# EAGLE board 800i Puissance-regulateur 2020serie1 (EAGLE 7.1.0)
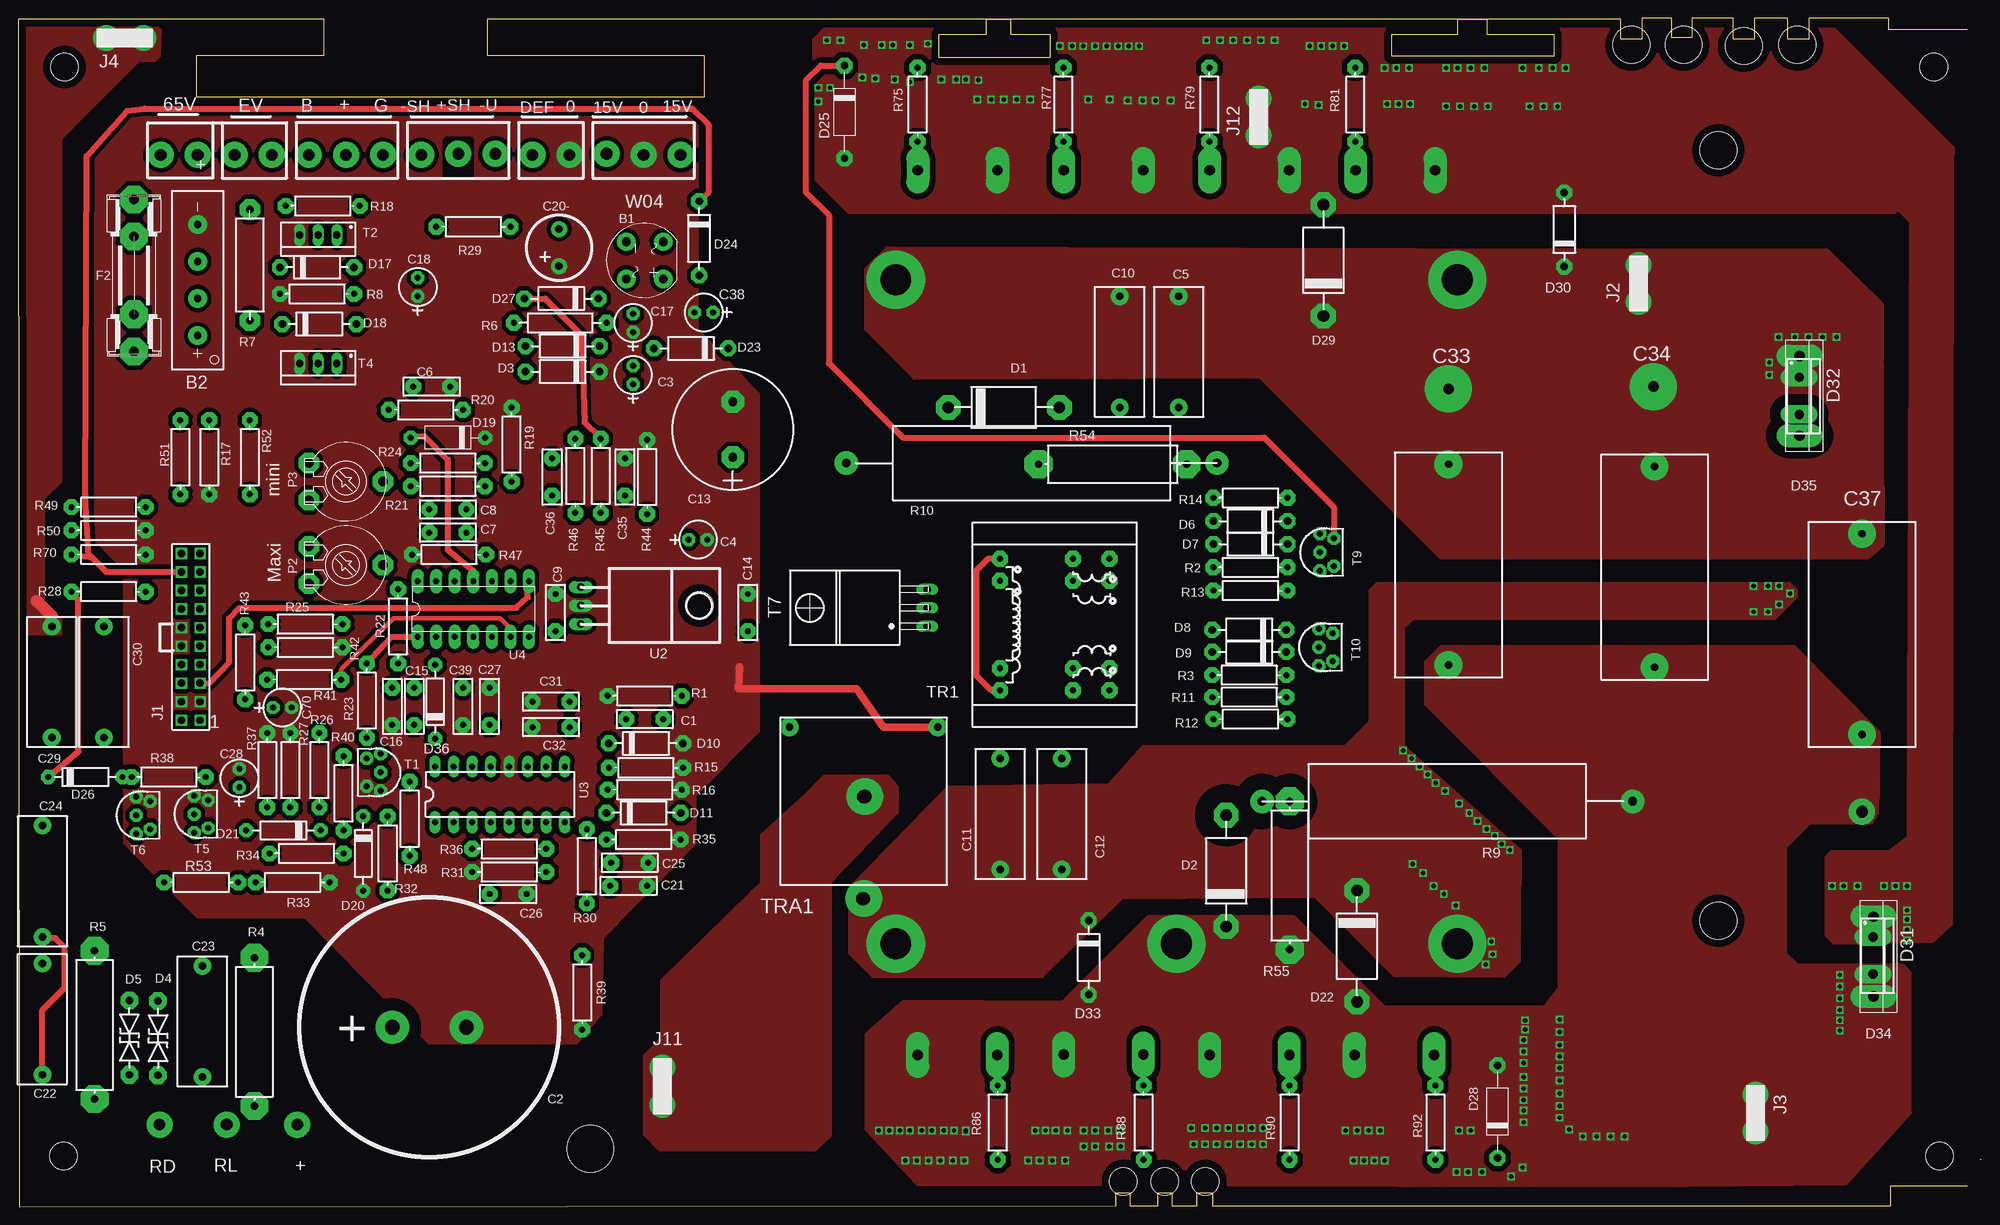
[diagram p0: board, top side]
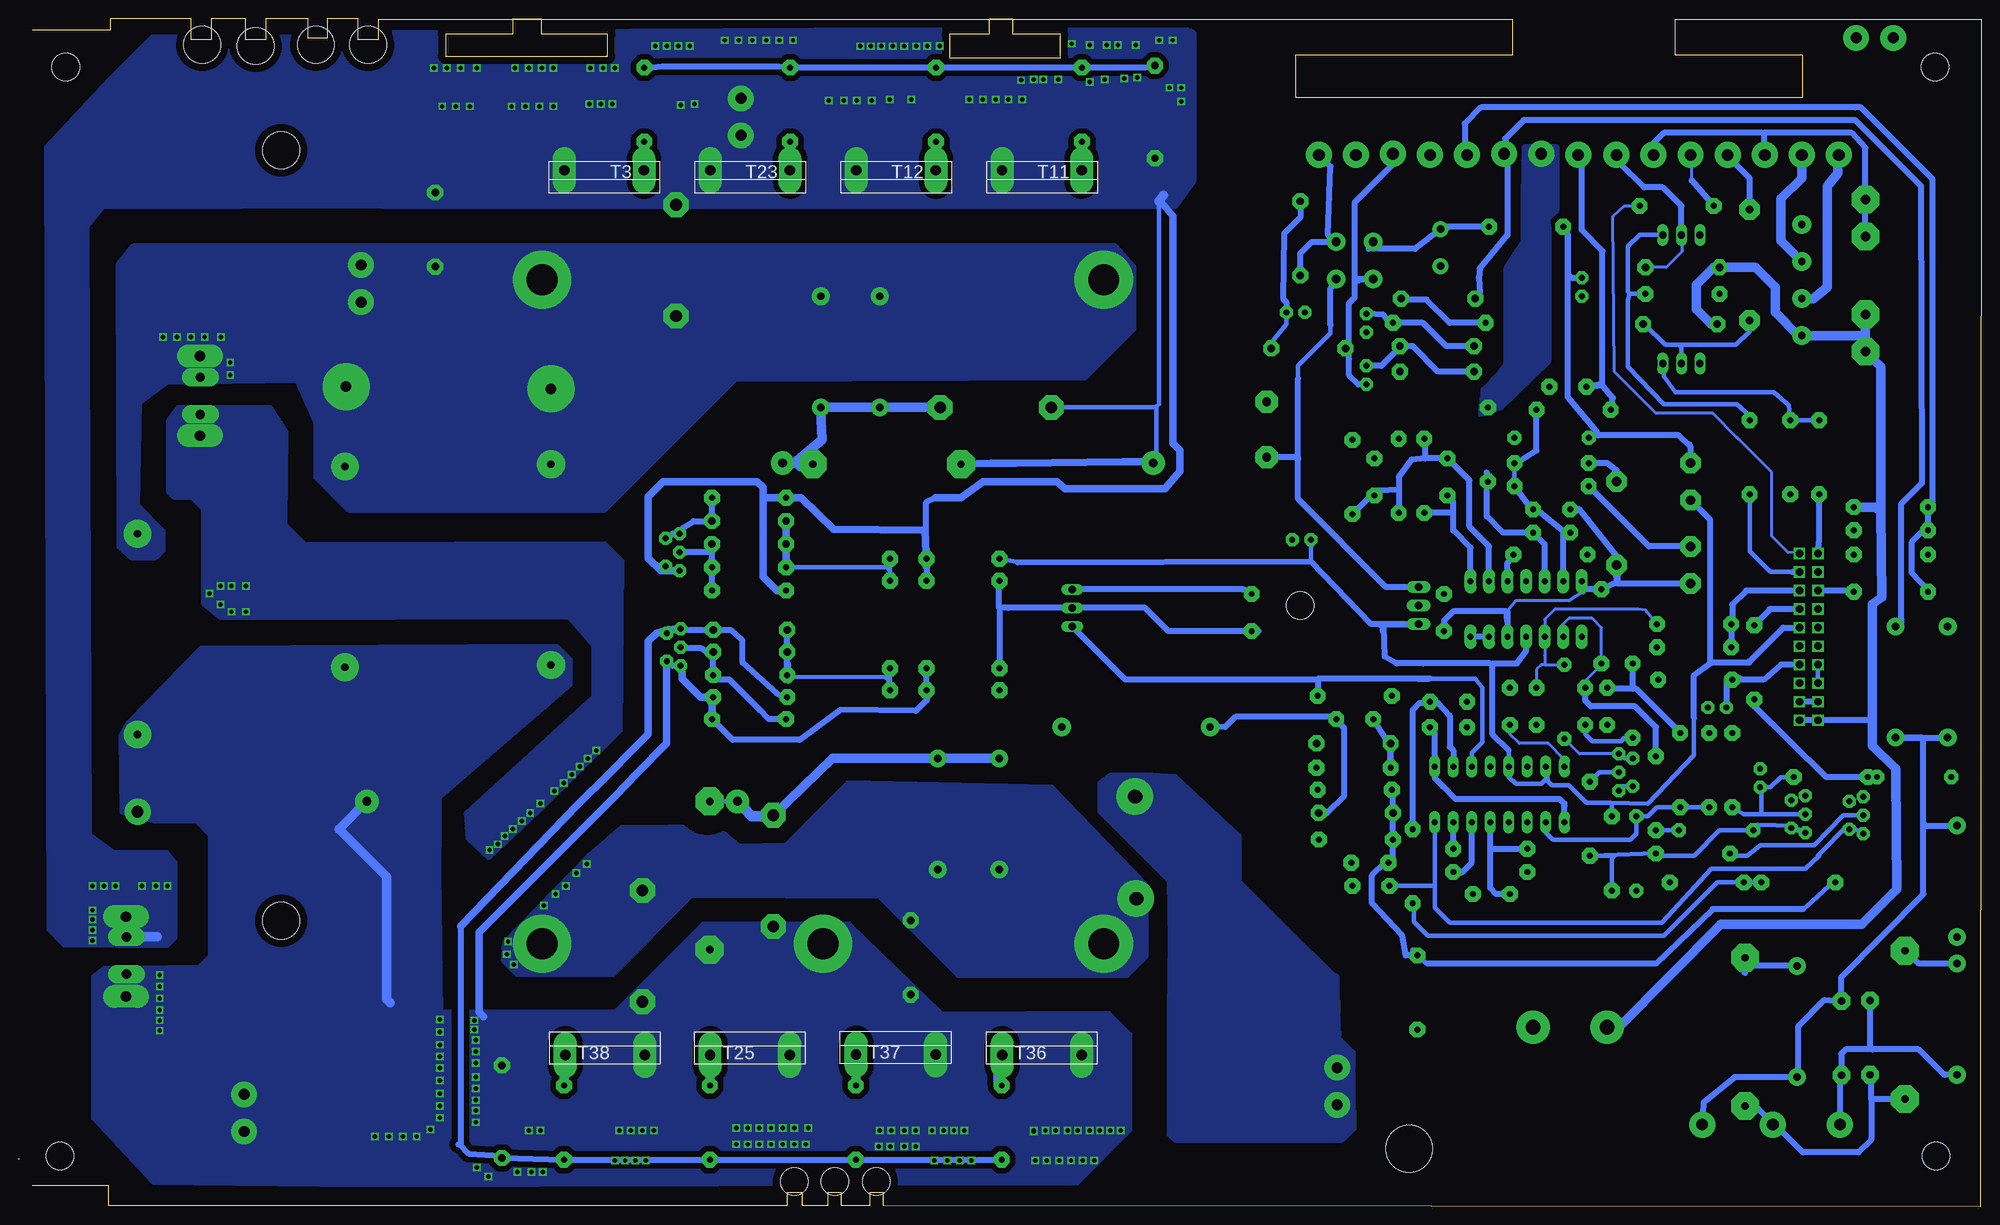
[diagram p1: board, bottom side, seen from below]

Size 269.08 x 162.87 mm. Coordinates in mm from the lower left corner, seen from the top.
Outline: 267.16,2.86 256.69,2.86 256.69,0.15 163.67,0.15 163.67,1.9 161.6,1.9 161.6,0.15 158.11,0.15 158.11,1.9 156.21,1.9 156.21,0.15 152.4,0.15 152.4,1.9 150.49,1.9 150.49,0.15 0.16,0 0,162.71 41.91,162.71 41.91,157.79 24.44,157.79 24.44,152.08 93.98,152.08 93.98,157.79 64.29,157.79 64.29,162.71 197.32,162.71
Outline: 267.17,161.28 266.7,161.28 256.38,161.28 256.38,162.87 245.42,162.87 245.42,160.01 242.57,160.01 242.57,162.87 237.96,162.87 237.96,160.01 235.1,160.01 235.1,162.87 229.39,162.87 229.39,160.17 226.69,160.17 226.69,162.87 222.56,162.87 222.56,160.01 219.71,160.01 219.71,162.71 197.32,162.71
Outline: 268.92,6.5 269.08,6.5
Outline: 197.32,162.71 197.32,160.65 188.27,160.65 188.27,157.63 210.5,157.63 210.5,160.65 201.29,160.65 201.29,162.71 197.32,162.71
Outline: 126.2,160.65 132.71,160.65 132.71,162.71 136.04,162.71 136.04,160.65 141.44,160.65 141.44,157.47 126.2,157.47 126.2,160.65
Copper layers (1*16): Top 0.035mm / dielectric 1.5mm / Bottom 0.035mm
Design rules "default": minimum track width 10mil, minimum drill 24mil, track to track 8mil, track to pad 8mil, pad to pad 8mil, via to via 8mil, smd to smd 8mil, copper to edge 40mil, drill to drill 8mil, minimum pad ring 10mil, minimum via ring 8mil, stop-mask expansion 0mil, vias tented up to drill 0mil, thermal gap 10mil
Holes 3.81 mm at 93.34,82.38 6.35,156.2 6.19,6.98 151.44,3.49 157.16,3.49 162.71,3.49 262.57,156.2 263.36,6.98
Holes 6.45 mm at 78.42,7.93
Holes 5.08 mm at 221.13,159.22 228.28,159.22 236.53,159.06 243.84,159.22 233.04,144.77 233.04,39.21
tRestrict: area 162.7,50.8 to 168.4,56.5; area 168.1,53.2 to 172.9,58; area 49.2,22.5 to 53.4,26.7; area 48.1,21.4 to 54.4,27.8; area 171.9,53.2 to 176.7,58; area 58.7,141.4 to 61.9,146
bRestrict: area 167,52 to 174,59.1; area 171.1,51.7 to 178.1,58.8

## Footprints (pad centres in the part's own frame; a part is rotated, then mirrored left to right if it is on the bottom)
WM = drill 1.2 pad 2.5: 1 -2.54,-2.54; 2 -2.54,2.54; 3 2.54,-2.54; 4 2.54,2.54
BR-24*7 = drill 0.406 pad 1.93 octagon: + 0,0; - 15.24,0; AC1 5.08,0; AC2 10.16,0
C-5 = drill 0.813 pad 2.159 octagon: 1 5.08,0; 2 0,0
470U_400 = drill 2 pad 4.572: N 10.16,0; P 0,0
02P000RA = drill 0.813 pad 1.778 octagon: N 2.54,0; P 0,0
C-15 = drill 1.016 pad 2.413: 1 0,0; 2 15.24,0
02P025RA = drill 1.2 pad 3.048 octagon: N 7.62,0; P 0,0
02P010RA = drill 1.016 pad 2.184: N 5.08,0; P 0,0
C-5@2 = drill 0.813 pad 2.159 octagon: 1 5.08,0; 2 0,0
C-30 = drill 1.016 pad 3.81: 1 0,0; 2 27.5,0
D-15 = drill 1.6 pad 3.4 octagon: A -7.62,0; K 7.62,0
D-10_1MM = drill 1.016 pad 2.184 octagon: A -5.08,0; K 5.08,0
TRANS-10 = drill 1.016 pad 2.413 octagon: A -5.08,0; K 5.08,0
D-10 = drill 0.813 pad 1.93 octagon: A -5.08,0; K 5.08,0
D-10@2 = drill 0.813 pad 1.93 octagon: A -5.08,0; K 5.08,0
D-12,5 = drill 1.016 pad 2.184 octagon: 1 -6.35,0; 2 6.35,0
TO220DIO = drill 1.27 pad 2.54 long: A 5.08,0; K 0,0
DOP-3V = drill 1.422 pad 3.175 long: A 5.461,0; K -5.461,0
SHK20L = drill 1.321 pad 3.81 octagon: 1A -10.414,0; 1B -5.334,0; 2A 10.414,0; 2B 5.334,0
CON10X2 = drill 0.813 pad 1.524 octagon: 1 0,0; 2 0,2.54; 3 2.54,0; 4 2.54,2.54; 5 5.08,0; 6 5.08,2.54; 7 7.62,0; 8 7.62,2.54; 9 10.16,0; 10 10.16,2.54; 11 12.7,0; 12 12.7,2.54; 13 15.24,0; 14 15.24,2.54; 15 17.78,0; 16 17.78,2.54; 17 20.32,0; 18 20.32,2.54; 19 22.86,0; 20 22.86,2.54
2_TROUS = drill 1.5 pad 3.5: 1 0,0; 2 0,5.08
PT-10 = drill 1.27 pad 2.794 octagon: 1 -2.54,-5.08; 2 2.54,-5.08; 3 0,5.08
PAST_4,2 = drill 4.2 pad 8: 1 0,0
R-10 = drill 0.813 pad 2.159 octagon: 1 -5.08,0; 2 5.08,0
R-18 = drill 1.016 pad 3.81 octagon: 1 -8.89,0; 2 11.43,0
R-12,5 = drill 0.813 pad 2.184 octagon: 1 -6.35,0; 2 6.35,0
R-15 = drill 1.016 pad 2.794 octagon: 1 -7.62,0; 2 7.62,0
R-50-5W = drill 1.2 pad 3.2: 1 2.54,0; 2 53.34,0
TO92_L = drill 0.813 pad 1.778 octagon: 1 0,0; 2 1.905,1.905; 3 3.81,0; 4 -0.635,1.905; 5 4.445,1.905
TO220V = drill 1.016 pad 1.524 long: 1 0,0; 2 2.54,0; 3 5.08,0
TOP-3VI = drill 1.422 pad 3.175 long: 1 5.461,0; 3 -5.461,0
TO220H = drill 1.016 pad 1.524 long: 1 0,0; 2 2.54,0; 3 5.08,0
TIUTK120 = drill 0.813 pad 2.184 octagon: 1 7.5,7.5; 3 7.5,-7.5; 4 7.5,-2.5; 5 -7.5,-7.5; 6 -7.5,-2.5; 8 -7.5,7.5
TISIRIO1 = drill 1.016 pad 2.54: P1 0,0; P2 20.32,0 | drill 1.8 pad 5: S1 10,9.5; S2 10.16,23.495
TO220H' = drill 1.016 pad 1.651 long: 1 0,0; 2 2.54,0; 3 5.08,0
DIL16 = drill 0.813 pad 1.524 long: 1 -8.89,-3.81; 2 -6.35,-3.81; 3 -3.81,-3.81; 4 -1.27,-3.81; 5 1.27,-3.81; 6 3.81,-3.81; 7 6.35,-3.81; 8 8.89,-3.81; 9 8.89,3.81; 10 6.35,3.81; 11 3.81,3.81; 12 1.27,3.81; 13 -1.27,3.81; 14 -3.81,3.81; 15 -6.35,3.81; 16 -8.89,3.81
DIL-14 = drill 0.813 pad 1.676 long: 1 -7.62,-3.81; 2 -5.08,-3.81; 3 -2.54,-3.81; 4 0,-3.81; 5 2.54,-3.81; 6 5.08,-3.81; 7 7.62,-3.81; 8 7.62,3.81; 9 5.08,3.81; 10 2.54,3.81; 11 0,3.81; 12 -2.54,3.81; 13 -5.08,3.81; 14 -7.62,3.81
PAST_1,8 = drill 1.8 pad 4.572: P$1 0,0
PAST_1,6 = drill 1.6 pad 3.556: 1 0,0
PAST_1,0 = drill 1.016 pad 2.54: 1 0,0

## Placement (x,y rotation side)
B1  W04  [WM]  85.88,129.69 90 top
B2  6A 400V  [BR-24*7]  24.6,119.37 90 top
C1  0.1µF  [C-5]  83.34,66.83 0 top
C2  4700µF 100v  [470U_400]  51.27,24.6 0 top
C3  100µF  [02P000RA]  84.29,112.71 90 top
C4  22µF  [02P000RA]  91.91,91.43 0 top
C5  4.7nF 1000V  [C-15]  159.06,124.77 270 top
C6  100n  [C-5]  54.13,112.39 0 top
C7  10n  [C-5]  56.35,92.39 0 top
C8  1n  [C-5]  61.43,95.56 180 top
C9  10nF  [C-5]  73.66,83.97 270 top
C10  4.7nF 1000V  [C-15]  150.97,124.77 270 top
C11  4.7nF 1000V  [C-15]  134.62,46.19 90 top
C12  4.7nF 1000V  [C-15]  143.03,46.19 90 top
C13  2200µF25V  [02P025RA]  97.94,102.7 90 top
C14  1nf  [C-5]  100.01,83.97 270 top
C15  4.7n  [C-5]  54.29,71.11 270 top
C16  néant  [C-5]  51.27,71.11 270 top
C17  22µF63v  [02P000RA]  84.29,119.85 90 top
C18  22µF25V  [02P000RA]  54.76,124.77 90 top
C20-  470µF25V  [02P010RA]  74.13,128.9 90 top
C21  10nF  [C-5]  81.12,43.97 0 top
C22  10n-630V  [C-15]  3.3,18.09 90 top
C23  10n-630V  [C-15]  25.24,33.01 270 top
C24  10n-1000V  [C-15]  3.33,36.98 90 top
C25  100nf  [C-5]  86.36,47.14 180 top
C26  4.7n  [C-5@2]  69.69,42.86 180 top
C27  100n  [C-5@2]  64.61,71.11 270 top
C28  4.7µF  [02P000RA]  30.32,57.46 90 top
C29  10nF-1000V  [C-15]  4.6,79.53 270 top
C30  10n-1000V  [C-15]  11.74,64.29 90 top
C31  1n  [C-5]  70.48,69.21 0 top
C32  10n  [C-5]  75.56,65.72 180 top
C33  10µF 800V  [C-30]  196.05,101.75 270 top
C34  10µF 800V  [C-30]  224.31,101.44 270 top
C35  4.7nF  [C-5]  83.18,102.55 270 top
C36  0.1µF  [C-5]  73.18,97.47 90 top
C37  10µF 800V  [C-30]  252.73,92.23 270 top
C38  4.7µF 25V  [02P000RA]  95.25,122.55 180 top
C39  470nF  [C-5]  60.95,66.03 90 top
C70  NM  [02P000RA]  34.92,68.41 0 top
D1  UF5408  [D-15]  135.09,109.53 180 top
D2  uf5408  [D-15]  165.57,46.03 270 top
D3  1N4004  [D-10_1MM]  74.61,114.45 0 top
D4  P6KE300CA  [TRANS-10]  19.16,23.1 270 top
D5  P6KE300CA  [TRANS-10]  15.23,23.17 90 top
D6  1N4148  [D-10_1MM]  168.91,93.97 0 top
D7  1N4148  [D-10_1MM]  168.91,90.8 0 top
D8  1N4148  [D-10_1MM]  168.75,79.05 0 top
D9  1N4148  [D-10_1MM]  168.75,76.03 0 top
D10  1N4148  [D-10_1MM]  86.04,63.49 180 top
D11  1N4148  [D-10_1MM]  85.72,53.97 180 top
D13  1N4004  [D-10_1MM]  74.61,117.94 0 top
D17  1N4004  [D-10_1MM]  40.95,128.74 180 top
D18  1N4004  [D-10_1MM]  41.27,120.96 180 top
D19  5.1V  [D-10]  58.89,105.4 0 top
D20  1N4148  [D-10@2]  47.3,48.41 90 top
D21  1N4148  [D-10]  36.35,51.59 0 top
D22  nm  [D-15]  183.51,35.71 90 top
D23  1N4004  [D-10_1MM]  92.23,117.63 0 top
D24  1N4004  [D-10_1MM]  93.34,132.71 90 top
D25  18V  [D-12,5]  113.27,150.03 90 top
D26  1N4148  [D-10]  9.2,58.89 180 top
D27  1N4004  [D-10_1MM]  74.45,124.45 0 top
D28  18V  [D-12,5]  202.77,13.03 270 top
D29  NM  [D-15]  178.91,129.69 270 top
D30  NM  [D-10_1MM]  211.92,133.91 270 top
D31  NM  [TO220DIO]  254.23,36.97 270 top
D32  NM  [TO220DIO]  244.13,113.66 270 top
D33  NM  [D-10_1MM]  146.74,34.15 90 top
D34  DSEI-120-12A  [DOP-3V]  254.31,34.28 270 top
D35  DSEI-120-12A  [DOP-3V]  244.15,111.12 270 top
D36  1N4148  [D-10]  57.15,69.21 270 top
F2  [SHK20L]  15.87,127.63 270 top
J1  [CON10X2]  24.92,66.67 90 top
J2  [2_TROUS]  222.09,123.98 0 top
J3  [2_TROUS]  238.12,15.39 180 top
J4  [2_TROUS]  12.06,160.17 270 top
J11  [2_TROUS]  88.29,19.05 180 top
J12  [2_TROUS]  170.01,146.81 0 top
P2  10k  [PT-10]  44.92,87.94 270 top
P3  10k  [PT-10]  44.92,99.37 270 top
PAS1  [PAST_4,2]  197.27,127.03 0 top
PAS2  [PAST_4,2]  120.27,127.03 0 top
PAS3  [PAST_4,2]  197.27,36.03 0 top
PAS4  [PAST_4,2]  120.27,36.03 0 top
PAS5  [PAST_4,2]  158.77,36.03 0 top
R1  10k  [R-10]  85.88,70 0 top
R2  560  [R-10]  168.91,87.62 0 top
R3  560  [R-10]  168.75,72.86 0 top
R4  22 3W  [R-18]  32.38,25.23 270 top
R5  22 3W  [R-18]  10.47,23.65 90 top
R6  5.6k  [R-12,5]  74.29,121.12 180 top
R7  330 2W  [R-15]  31.75,129.06 90 top
R8  4.7k  [R-10]  40.95,125.09 0 top
R9  NM  [R-50-5W]  223.83,55.56 180 top
R10  NM  [R-50-5W]  110.96,101.91 0 top
R11  1k  [R-10]  168.75,69.84 180 top
R12  220  [R-10]  168.91,66.83 180 top
R13  220  [R-10]  168.91,84.45 0 top
R14  1k  [R-10]  168.91,97.15 0 top
R15  10k  [R-10]  86.04,60.16 180 top
R16  10  [R-10]  85.88,57.14 180 top
R17  4.7k  [R-10]  26.19,102.71 90 top
R18  150k  [R-10]  41.75,137.15 0 top
R19  2.2k  [R-10]  67.62,104.45 270 top
R20  2.2k  [R-10]  55.88,109.21 180 top
R21  22k  [R-10]  58.89,98.74 180 top
R22  15k  [R-10]  52.07,79.53 90 top
R23  270k  [R-10]  47.78,69.37 270 top
R24  3.3M  [R-10]  58.89,101.91 180 top
R25  10k  [R-10]  39.37,79.84 0 top
R26  4.7k  [R-10]  41.27,59.84 270 top
R27  2.2k  [R-10]  37.3,59.84 270 top
R28  33k  [R-10]  12.38,84.29 0 top
R29  1.5k  [R-10]  62.38,134.3 180 top
R30  47  [R-10]  77.94,46.67 270 top
R31  4.7k  [R-10]  67.31,45.87 0 top
R32  2.2k  [R-10]  50.64,48.41 90 top
R33  NM  [R-10]  37.62,44.44 180 top
R34  10k  [R-10]  39.52,48.41 0 top
R35  4.7  [R-10]  85.72,50.32 0 top
R36  47  [R-10]  67.31,49.05 0 top
R37  10k  [R-10]  34.13,59.84 270 top
R38  10K  [R-10]  20.63,58.89 0 top
R39  10  [R-10]  77.31,29.36 270 top
R40  10k  [R-10]  44.6,56.67 270 top
R41  1k  [R-10]  39.21,72.22 180 top
R42  10k  [R-10]  39.37,76.67 180 top
R43  4.7K  [R-10]  31.11,74.61 90 top
R44  10k  [R-10]  86.2,100.01 270 top
R45  86.6k  [R-10]  79.85,100.16 270 top
R46  10k  [R-10]  76.35,100.16 270 top
R47  10k  [R-10]  59.05,89.37 0 top
R48  10k  [R-10]  53.65,53.18 90 top
R49  47k  [R-10]  12.38,95.88 0 top
R50  33k  [R-10]  12.38,92.7 0 top
R51  2.2k  [R-10]  22.22,102.71 90 top
R52  2.2k  [R-10]  31.75,102.7 90 top
R53  33  [R-10]  25.08,44.44 180 top
R54  22-3W  [R-18]  148.74,101.75 0 top
R55  22-3W  [R-18]  174.3,44.13 90 top
R70  10k  [R-10]  12.38,89.37 180 top
R75  4.7  [R-10]  123.27,151.03 270 top
R77  4.7  [R-10]  143.27,151.03 270 top
R79  4.7  [R-10]  163.27,151.03 270 top
R81  4.7  [R-10]  183.27,151.03 270 top
R86  4.7  [R-10]  134.27,11.53 90 top
R88  4.7  [R-10]  154.27,11.53 90 top
R90  4.7  [R-10]  174.27,11.53 90 top
R92  4.7  [R-10]  194.27,11.53 90 top
T1  BC547  [TO92_L]  47.78,61.43 270 top
T2  FQP46N15  [TO220V]  43.65,133.19 180 top
T3  [TOP-3VI]  188.77,142.03 180 top
T4  FDPF 770N15A  [TO220V]  43.65,115.56 180 top
T5  BC547  [TO92_L]  26.03,51.91 90 top
T6  BC547  [TO92_L]  18.09,51.75 90 top
T7  IRF530  [TO220H]  124.61,79.53 90 top
T9  BC327-25  [TO92_L]  180.34,87.78 90 top
T10  BC 327-25  [TO92_L]  180.18,74.76 90 top
T11  4X NGTB 40N120FL3WG  [TOP-3VI]  128.77,142.03 180 top
T12  [TOP-3VI]  148.77,142.03 180 top
T23  [TOP-3VI]  168.77,142.03 180 top
T25  [TOP-3VI]  168.78,20.79 0 top
T36  4X NGTB 40N120FL3WG  [TOP-3VI]  128.74,20.79 0 top
T37  [TOP-3VI]  148.78,20.87 0 top
T38  [TOP-3VI]  188.64,20.79 0 top
TR1  TI/117120 SIRIO  [TIUTK120]  142.08,78.26 90 top
TR2  NM  [TIUTK120]  142.08,81.27 90 top
TRA1  150320 SIRIO  [TISIRIO1]  126.04,65.72 180 top
U2  LM7812  [TO220H']  77.15,84.93 270 top
U3  SG3525  [DIL16]  66.04,56.51 0 top
U4  LM324  [DIL-14]  62.38,81.91 0 top
U$4  [PAST_1,8]  115.72,42.22 0 top
U$7  [PAST_1,8]  115.88,56.19 270 top
U$8  [PAST_1,6]  29.68,144.14 0 top
U$33  [PAST_1,6]  252.73,54.13 0 top
U$34  [PAST_1,6]  60.32,144.3 0 top
U$36  [PAST_1,0]  24.6,134.61 90 top
U$38  [PAST_1,0]  24.6,129.53 90 top
U$44  [PAST_1,6]  38.25,11.26 270 top
U$47  [PAST_1,0]  24.6,119.37 90 top
U$54  [PAST_1,0]  24.6,124.45 90 top
U$71  [PAST_1,6]  28.57,11.26 270 top
U$74  [PAST_1,6]  19.36,11.27 270 top
U$75  [PAST_1,6]  50,144.14 270 top
U$76  [PAST_1,6]  19.52,144.14 270 top
U$77  [PAST_1,6]  24.6,144.14 270 top
U$78  [PAST_1,6]  44.92,144.14 270 top
U$79  [PAST_1,6]  34.76,144.14 270 top
U$80  [PAST_1,6]  39.84,144.14 270 top
U$81  [PAST_1,6]  75.56,144.14 270 top
U$82  [PAST_1,6]  65.4,144.3 270 top
U$85  [PAST_1,6]  55.24,144.14 270 top
U$86  [PAST_1,6]  70.48,144.14 270 top
U$88  [PAST_1,6]  90.8,144.14 180 top
U$90  [PAST_1,6]  85.72,144.14 90 top
U$106  [PAST_1,6]  80.64,144.3 90 top

## Library data of the parts
B1 D34 D35 = SEMICON
B2 = SEMICON1
C1-C3 C5 C10-C14 C17 C31-C39 C70 D1-D11 D13 D17 D18 D21-D24 D26 D27 D29 D30 D33 D36 P2 P3 R1-R18 R28 R34-R38 R40-R55 R70 R75 R77 R79 R81 R86 R88 R90 R92 = passif
C4 C6-C9 C15 C16 C18 C20- C22-C24 C26-C30 = C
C21 C25 = C@2
D19 D20 R19-R27 R29-R33 R39 = DISCRETE
D25 D28 = DISCRETE@3
D31 D32 = SEMICON@2
F2 = fuse
J1 = CONNECT
J2-J4 J11 J12 = CONNECT1
PAS1-PAS5 U$4 U$7 U$8 U$33 U$34 U$36 U$38 U$44 U$47 U$54 U$71 U$74-U$82 U$85 U$86 U$88 U$90 U$106 = PAST
T1 T2 T4-T7 T9 T10 = TRANS1
T3 T11 T12 T23 T25 T36-T38 = TRANS
TR1 TR2 = special
TRA1 = transformateurs
U2 = regulate
U3 = THOMSON
U4 = LINEAR

## Nets
+: C23.2 C24.2 C29.2 C30.1 D4.A U$44.1
+12V: C4.P J1.11 P3.2 R32.2 TR1.8 TR2.1 U2.3 U3.13 U3.15 U4.4
+20V: B1.1 C13.P U2.1
+90: B2.+ C2.P D17.K D18.K F2.2A F2.2B J1.1 J1.2 R49.2 U$47.1
+VREF: C27.1 U3.16
-5,8V: C18.N D19.A P3.1 R29.2 U4.11
-20V: B1.4 C20-.N R29.1
-SH: C6.2 R20.2 U$85.1
-U: C30.2 D27.A R45.1 U$82.1
B: D17.A T2.2 U$75.1
BOBINE: J1.17 R52.1
CONSIGNE: J1.15 R25.1 R42.2
DEF: D26.K R28.1 R49.1 R50.1 U$86.1
DEFAUT: J1.16 R28.2
ENABLE: J1.13 R43.2
ENABLE1: D26.A R38.1 R43.1
EV: J1.20 R51.1
GACHETTE: R18.1 U$80.1
GAZ: R7.2 U$79.1
GND: B2.- C2.N C4.N C6.1 C9.2 C13.N C14.2 C16.1 C17.P C18.P C20-.P C21.1 C25.2 C26.2 C27.2 C28.N C31.2 C32.1 C35.2 C38.N C39.2 C70.N D3.K D10.A D19.K D20.A J1.3 J1.4 J1.10 J1.12 R1.1 R8.1 R15.1 R16.1 R17.1 R19.1 R27.1 R31.1 R33.1 R35.2 R37.1 R39.2 R42.1 R44.1 R47.1 R50.2 R70.1 T1.3 T1.5 T2.3 T4.3 T5.3 T5.5 T6.3 T6.5 T7.3 TRA1.P1 U2.2 U3.12 U$34.1 U$36.1 U$81.1 U$90.1
GNDA: C29.1 J4.1 J4.2
LIMIT: C25.1 D11.K R16.2 R35.1 R39.1 R53.2
MESURE: C70.P J1.7 R41.2
MESURE*U: C36.2 J1.5 R46.2 U4.8
N$1: C33.2 C34.2 C37.2 D2.K D22.A D28.1 D31.A D33.A D34.A J3.1 J3.2 PAS5.1 R9.1 R11.1 R12.1 R55.1 T10.1 T10.4 T25.3 T36.3 T37.3 T38.3 TR1.6 TR2.6 U$33.1
N$2: R86.2 T36.1
N$3: B2.AC1 U$54.1 U$76.1
N$4: B2.AC2 U$38.1 U$77.1
N$5: C11.1 C12.1 D22.K D32.A D33.K D35.A PAS3.1 PAS4.1 TRA1.S2 U$4.P$1
N$6: D6.A D7.A R2.1 TR1.3 TR2.3
N$7: J1.19 R18.2
N$8: D6.K D25.2 R14.2 R75.1 R77.1 R79.1 R81.1 T9.3 T9.5
N$9: R30.2 R33.2 R53.1
N$10: F2.1A F2.1B U$8.1 U$78.1
N$11: D18.A R7.1 T4.2
N$12: C7.1 R19.2 U4.12
N$13: C7.2 C8.2 R20.1 R21.1 R24.1 U4.13
N$14: C21.2 T6.1 T6.4 U3.8
N$15: D7.K R2.2 R13.2 T9.2
N$16: R17.2 R51.2 T4.1
N$17: C23.1 R4.1
N$18: D21.A R32.1 R34.2 R48.1 T5.1 T5.4
N$19: C14.1 T7.2 TR1.1 TR2.8
N$20: R79.2 T23.1
N$21: C22.2 R5.2
N$22: C1.1 D11.A TRA1.P2
N$23: R8.2 R52.2 T2.1
N$25: C17.N D13.A R6.1
N$26: C15.1 R23.2
N$27: C1.2 D10.K R15.2
N$28: D21.K R40.2
N$29: D27.K R6.2
N$30: R81.2 T3.1
N$31: C15.2 R22.1 R40.1 U4.2
N$32: P3.3 R24.2
N$33: R41.1 U4.6 U4.7
N$35: C16.2 R23.1 R26.1 U4.1
N$36: C39.1 D36.A R25.2 U4.3
N$37: C5.1 C10.1 C33.1 C34.1 C37.1 D29.K D30.K D32.K D35.K J2.1 J2.2 PAS1.1 PAS2.1
N$39: D8.A D9.A R3.1 TR1.5 TR2.5
N$40: D8.K D28.2 R11.2 R86.1 R88.1 R90.1 R92.1 T10.3 T10.5
N$41: D9.K R3.2 R12.2 T10.2
N$42: R88.2 T37.1
N$43: P2.1 R21.2
N$44: D36.K T1.1 T1.4
N$45: C28.P R37.2 R38.2 T5.2
N$46: R48.2 T1.2
N$47: R34.1 T6.2
N$48: C31.1 R30.1 U3.10
N$50: C32.2 U3.1 U3.9
N$51: C26.1 R36.1 U3.5
N$52: R31.2 U3.6
N$53: R36.2 U3.7
N$55: C3.N D3.A D13.K
N$56: C35.1 C36.1 R44.2 R45.2 R46.1 U4.9
N$57: R47.2 U4.10
N$63: R90.2 T25.1
N$68: R92.2 T38.1
N$74: C11.2 C12.2 D2.A R9.2 R55.2
N$75: C5.2 C10.2 D1.A R10.2 R54.2
N$83: R75.2 T11.1
N$86: R77.2 T12.1
PWM: R1.2 T7.1 U3.11
RD: C22.1 C24.1 D4.K D5.K U$74.1
REG: D20.K R26.2 R27.2 U3.2
RESEAU: C38.P D23.K D24.K J1.18 R70.2
RL: D5.A R4.2 R5.1 U$71.1
SI: C8.1 C9.1 P2.2 P2.3 R22.2 U4.5 U4.14
TRANSF3: D1.K D25.1 D29.A D30.A D31.K D34.K J12.1 J12.2 R10.1 R13.1 R14.1 R54.1 T3.3 T9.1 T9.4 T11.3 T12.3 T23.3 TR1.4 TR2.4
TRANSF4: J11.1 J11.2 TRA1.S1 U$7.P$1
~1: B1.3 D24.A U$88.1
~2: B1.2 C3.P D23.A U$106.1

## Tracks (layer width: path | path; a pad name or v marks a point on that pad's centre or on a via)
+
  Bottom 0.813: U$44.1 38.1,14.28 33.81,17.77 C23.2 24.92,17.77 | 24.76,17.61 24.92,17.77 | 24.92,17.77 25.08,17.93 25.08,24.76 21.5,28.34 D4.A 19.16,28.52 19.2,28.57 19.2,31.43 7.93,42.86 7.93,52.22 | 7.93,52.22 7.93,64.13 8.09,64.29 C30.1 11.74,64.45 11.58,64.6 11.27,64.29 C29.2 | 7.93,52.22 C24.2 | 7.93,52.22 7.77,52.38
+12V
  Top 0.813: TR2.1 132.91,88.77 131.28,87.15 131.28,72.86 133.35,70.8 134.77,70.8 134.74,70.76 TR1.8
  Bottom 0.61: U3.13 | U3.13 64.92,60.64 64.77,60.48 64.77,62.54 | U3.13 64.77,58.89 63.81,57.94 60.32,57.94 59.69,58.57 U3.15 | 66.99,74.45 67.31,74.45 | 39.37,66.99 39.37,61.91 45.72,55.24 50.8,55.4 | 50.8,55.4 54.13,55.4 56.51,57.78 58.89,57.78 59.53,58.41 59.53,58.57 | R32.2 50.64,55.24 50.8,55.4 | 92.07,91.43 | 92.07,91.43 C4.P | 91.91,88.42 91.91,91.27 92.07,91.43 | 132.08,88.26 132.23,88.42 134.3,88.73 134.46,88.73 134.5,88.77 TR2.1 | J1.11
  Bottom 0.813: U3.15 | 59.53,58.57 59.53,60.16 U3.15 | 64.77,62.54 66.99,64.76 66.99,74.45 63.65,74.45 62.38,76.19 U4.4 | 39.37,66.99 39.37,72.86 37.14,74.45 | 37.14,74.45 36.67,74.61 31.75,74.61 31.75,74.76 27.14,79.37 J1.11 | 67.31,74.45 76.51,74.45 80.16,74.45 81.75,75.4 81.91,79.53 82.07,79.69 | 82.07,79.69 82.23,79.69 82.39,79.84 82.07,79.84 | 82.07,79.84 82.07,78.89 | 132.08,88.26 91.91,88.42 83.66,79.84 U2.3 82.07,79.84 | 82.07,79.84 | 82.07,79.69 82.07,79.84 | P3.2 | 37.14,74.45 37.14,94.13 P3.2 | 64.77,60.48
+20V
  Bottom 0.61: C13.P 97.94,102.86 99.21,102.7 | 89.21,120.8 89.21,119.69 93.66,115.25 93.66,113.66 93.66,113.5
  Bottom 0.813: 89.21,120.8 89.21,125.88 88.74,126.36 B1.1 | 93.66,102.7 93.66,113.5 | 93.66,102.7 99.21,102.7 | 99.21,102.7 | 93.66,102.7 93.66,102.39 93.66,96.99 81.59,84.92 77.31,84.92 | 77.31,84.92 | U2.1 77.31,84.92
+90  (via drill 1.02)
  Bottom 0.813: J1.2 22.06,66.67 | J1.2 J1.1 | 14.92,66.67 J1.2
  Bottom 1.27: 14.92,66.83 14.92,66.67 15.08,66.67 14.92,66.83 | 14.92,66.83 | 14.92,66.83 14.92,82.54 13.65,83.5 13.81,95.24 | 14.92,66.83 | 14.92,66.83 14.92,63.18 11.74,60 11.74,59.52 11.58,43.49 16.35,38.73 19.52,38.73 20.79,38.73 35.71,38.73 49.68,24.6 C2.P | 13.81,95.24 | R49.2 14.44,95.88 13.81,95.24 | B2.+ 25.08,119.37 28.25,122.55 28.25,126.04 30.95,128.74 35.56,128.74 | D18.K 36.98,120.96 39.05,123.02 39.05,126.36 36.67,128.74 35.56,128.74 | 35.56,128.74 35.08,128.74 D17.K 35.56,128.74 | 13.81,95.24 13.81,115.09 15.87,117.15 F2.2A F2.2B 15.87,119.21 16.03,119.37 B2.+ | B2.+ 24.44,119.21 | B2.+ | B2.+
  other vias: 22.38,66.67 24.92,66.67
+VREF
  Bottom 0.406: U3.16 57.15,61.27 59.37,63.49 63.34,63.49 64.61,64.76 64.45,66.03 C27.1
-5,8V
  Top 0.61: 53.49,105.56 | D19.A 53.49,105.56
  Top 0.813: U4.11 62.38,87.15 58.89,90 58.89,102.39 55.72,105.56 53.49,105.56
  Bottom 0.813: 52.7,106.2 52.54,105.72 41.43,105.72 39.84,104.13 | 52.7,106.2 D19.A | 56.67,133.34 R29.2 | 56.67,133.34 56.67,112.71 56.67,110.96 52.7,106.2 | P3.1 39.68,101.91 40,102.7 40,102.86 39.84,103.02 39.84,104.13 | 39.84,104.13 40,104.45 | 56.67,133.34 | 56.67,133.34 | 56.67,133.34 56.67,127.79 56.19,127.31 C18.N | 56.67,133.34 56.83,133.5
-20V
  Bottom 0.813: R29.1 73.02,134.3 73.5,134.3 74.29,133.98 C20-.N 77.62,131.28 83.97,131.28 | 83.97,131.28 | 83.97,131.28 B1.4
-SH
  Bottom 0.813: U$85.1 | U$85.1 54.76,143.34 54.76,142.39 54.76,133.82 51.91,130.96 51.91,112.55 53.97,112.39 | 53.97,112.39 | 53.97,112.39 C6.2 | 53.97,112.39 52.07,112.71 50.48,110.8 R20.2
-U
  Top 0.813: D27.A 72.23,124.45 77.31,119.37 77.31,118.26 77.62,107.47 79.53,105.56 R45.1
  Bottom 0.813: 69.37,124.61 68.73,125.25 68.89,127.31 68.73,128.58 64.92,133.18 64.92,143.82 65.56,143.82 U$82.1 | 69.37,124.61 69.53,124.61 | 69.37,124.61 | 69.53,124.61 D27.A | 69.53,124.61 | U$82.1 65.24,146.36 62.7,148.9 17.3,148.9 8.25,139.85 8.09,99.21 10.95,96.35 10.95,80.48 10.95,80.16 11.58,79.53 C30.2 | 65.56,144.3 | U$82.1 65.56,144.3 | 65.56,144.3 U$82.1
B
  Bottom 0.406: D17.A 43.18,128.74 40.95,130.96 40.95,132.87 40.79,133.03 40.95,133.18 T2.2 | 50,143.5 U$75.1 | T2.2 40.95,133.03 | T2.2 | T2.2
  Bottom 0.813: 50,143.5 49.53,143.03 46.19,139.69 43.65,139.69 41.11,137.15 T2.2
BOBINE  (via drill 1.02)
  Bottom 0.61: R52.1 31.75,89.85 28.89,86.99 28.57,86.99 28.41,86.99 25.87,86.99
  Bottom 0.813: v24.92,86.99 25.87,86.99
CONSIGNE  (via drill 1.02)
  Bottom 0.813: J1.15 32.22,84.45 34.13,82.54 34.13,79.84 | 34.13,79.84 | 34.13,79.84 R25.1 34.29,76.99 34.13,76.83 R42.2
  other vias: 24.92,84.45
DEF
  Top 0.813: R28.1 7.3,84.13 8.25,83.18 8.25,62.38 D26.K
  Bottom 0.406: 6.66,95.56 R49.1
  Bottom 0.813: R28.1 7.3,84.45 9.52,86.83 | 16.51,150.65 | 16.51,150.65 17.3,150.65 68.58,150.65 70.8,148.42 70.8,144.14 U$86.1 70.32,143.98 | 16.51,150.65 6.66,140.8 6.66,140.17 6.66,95.56 7.46,95.08 7.3,95.08 | 7.3,95.08 | R50.1 | 7.3,95.08 R50.1 | R50.1 7.93,92.7 9.52,91.12 9.52,86.83 | 9.52,86.83
DEFAUT
  Bottom 0.61: J1.16
  Bottom 0.813: R28.2 16.98,84.45 J1.16 | J1.16
ENABLE
  Bottom 0.813: R43.2 29.05,81.75 29.05,81.91 28.09,81.91 J1.13
ENABLE1
  Bottom 0.813: R38.1 16.03,58.89 | D26.A 14.92,59.05 R38.1 | R38.1 21.27,58.89 31.11,68.57 R43.1
EV  (via drill 1.02)
  Bottom 0.813: J1.20 22.22,91.43 R51.1
  other vias: 22.38,89.53
GACHETTE
  Bottom 0.406: 39.68,140.65 39.68,143.19 | U$80.1 | U$80.1 | 39.68,143.98 U$80.1
  Bottom 0.813: R18.1 39.68,140.65 | 39.68,143.19 39.68,143.98
GAZ
  Bottom 0.406: 34.76,143.98 U$79.1
  Bottom 0.813: R7.2 31.75,140.96 34.76,143.98
GND  (via drill 1.02)
  Top 1.016: TRA1.P1 118.58,65.72 114.93,70.95 98.74,70.95 98.9,73.97
  Bottom 0.61: T1.5 49.84,56.98 49.21,57.62 T1.3
  Bottom 0.813: 22.22,69.21 v22.38,69.21 v24.92,69.21 | T7.3 101.28,84.61 99.53,83.97 99.53,84.13 99.37,83.97 C14.2
  Bottom 1.27: 85.72,144.3 | U$90.1 85.72,144.3
  other vias: 22.38,76.83 22.38,79.37
  pour Top (isolate 0.6, no thermals): 18.73,153.66 89.53,153.66 93.02,150.17 93.02,120.33 101.44,111.44 101.44,103.02 101.44,65.08 92.71,56.35 92.71,49.68 80.01,36.82 79.85,26.35 76.51,22.38 56.35,22.38 39.37,39.68 24.6,39.68 18.41,45.87 14.6,49.84 14.6,59.21 14.6,87.31 10.47,91.43 10.63,92.23 10.63,145.57
  pour Bottom (isolate 0.014, no thermals): 58.26,136.52 59.53,135.41 59.37,133.82 59.37,133.34 59.37,115.88 65.88,109.53 68.58,108.58 68.26,111.12 68.26,111.91 66.04,114.14 65.08,115.41 65.08,128.58 62.7,132.23 62.7,137.31 62.7,138.42 62.54,145.25 58.26,145.25
GNDA
  Top 1.676: C29.1 4.6,80.96 2.54,83.02
  pour Top (isolate 0.014, no thermals): 0.15,162.24 18.41,162.4 19.52,161.28 19.36,157.63 18.73,157 16.51,157 5.87,146.36 5.87,99.37 3.49,96.99 3.49,82.86 5.87,80.48 5.87,78.42 0.15,78.42
LIMIT
  Bottom 0.61: R39.1 77.94,35.24 76.04,33.33 75.88,33.33 | 81.75,47.14 C25.1 80.64,47.78 | R35.1 | R35.1 | R53.2 20,44.76 23.97,41.11 24.44,40.79
  Bottom 0.813: 75.88,33.33 44.6,33.33 36.83,40.79 24.44,40.79 | 80.96,57.14 | 80.96,57.14 R16.2 | D11.K | D11.K 80.64,56.83 80.96,57.14 | R39.1 78.89,34.44 79.37,37.14 83.5,41.59 83.5,45.4 81.75,47.14 | 80.64,47.78 R35.1 | R35.1 D11.K
MESURE
  Bottom 0.61: J1.7 | J1.7 | J1.7 24.76,74.13
  Bottom 0.813: J1.7 27.46,74.29 29.84,72.22 33.17,72.22 33.02,72.38 R41.2 34.92,72.22 C70.P
MESURE*U  (via drill 1.02)
  Top 0.813: U4.8 69.85,85.4 69.85,83.5 68.26,82.07 51.75,82.07 51.11,82.07 41.59,82.07 30.32,82.07 28.89,80.64 28.89,76.67 28.89,74.61 26.19,71.75 J1.5
  Bottom 0.813: U4.8 70,90.32 72.39,92.7 72.39,94.93 | 72.39,94.93 72.39,96.67 C36.2 | R46.2 72.54,95.08 72.39,94.93
  other vias: 24.92,71.75
N$1  (via drill 0.61)
  Bottom 0.813: T10.1 180.02,74.76 179.38,74.13 T10.4 | TR2.6 144.58,71.15 144.78,70.95 TR1.6 144.58,69.41 146.05,67.94 156.36,68.1 161.92,63.97 171.13,63.97 R12.1 173.99,69.37 173.67,69.68 R11.1 | R11.1
  Bottom 1.016: 174.14,69.21 | 174.14,69.21 R11.1 174.78,69.84 175.57,69.84 178.11,72.38 178.11,74.29 T10.4 | R12.1 173.99,69.05 174.14,69.21 | T10.4 | T10.1 180.18,63.49 184.3,59.37 187.16,56.35 205.89,37.62 205.89,26.66 205.26,26.03
  Bottom 1.27: R9.1 225.1,51.75 218.59,45.24 218.59,28.41 218.12,27.93
  other vias: 206.53,25.55 206.53,24.28 206.37,11.58 206.37,13.17 206.37,14.6 206.37,16.19 211.29,25.69 211.29,23.94 211.29,22.2 211.29,20.61 211.29,19.02 211.29,17.27 211.29,15.53 211.29,13.78 249.69,31.74 249.69,30.16 249.69,28.57 249.69,26.98 249.69,25.55 249.69,24.12 206.21,5.39 204.62,4.12 181.92,10.47 183.51,10.47 185.1,10.47 186.69,10.47 187.32,6.34 185.89,6.34 184.46,6.34 183.03,6.34 165.89,10.79 164.3,10.79 162.71,10.79 160.81,10.79 147.63,8.25 149.38,10.47 150.97,10.47 146.05,10.47 147.63,10.47 151.13,8.25 143.82,10.47 142.24,10.47 140.81,10.47 139.38,10.47 126.84,10.47 117.95,10.47 129.85,10.47 128.27,10.47 128.11,6.34 129.69,6.34 126.36,6.34 124.77,6.34 138.43,6.34 140.01,6.34 141.76,6.34 143.51,6.34 121.6,6.34 119.38,10.47 123.19,6.34 125.25,10.47 123.82,10.47 129.85,10.31 120.8,10.47 122.23,10.47 149.54,8.25 146.05,8.25 161.13,8.57 162.71,8.57 164.3,8.57 165.89,8.57 167.48,8.57 169.06,8.57 170.65,8.57 167.48,10.79 169.06,10.79 170.65,10.79 197.48,10.47 199.07,10.47 200.66,4.76 198.75,4.76 197.16,4.76 211.29,12.19 212.56,10.61 214.47,9.65 216.37,9.65 218.28,9.65 220.18,9.65 206.37,17.77 206.37,19.68 206.37,21.27 206.37,22.85
  pour Top (isolate 0.762, no thermals): 116.36,23.65 121.44,28.09 143.19,27.93 154.94,39.68 174.78,39.68 187.16,27.3 209.26,27.3 211.32,30 211.32,50.55 192.99,68.91 193,74.63 195.06,76.69 243.36,76.67 254.95,64.92 254.79,53.97 254,52.7 245.5,52.7 242.17,49.37 242.17,34.63 243.77,33.03 258.27,33.03 259.2,32.1 259.2,27.93 259.2,12.85 250.46,3.25 221.77,2.98 123.34,3.17 116.36,10.63
  pour Bottom (isolate 0.8, no thermals): 116.52,10.47 116.52,23.65 119.53,26.66 142.39,26.5 155.12,38.86 175.28,38.86 187.32,26.82 219.55,26.82 222.56,24.44 222.25,2.87 123.82,3.17
  pour Bottom (isolate 0.014, no thermals): 215.65,8.41 222.09,2.84 250.58,3.16 258.89,12.06 258.89,31.59 257.3,32.86 244.27,33.03 242.8,34.5 242.8,50.79 244.71,52.7 250.5,52.7 254.95,53.97 255.11,64.61 254,66.51 244.05,76.72 195.27,77.03 193.27,75.03 193.27,71.53 211.27,56.03 211.27,52.8 211.34,45.87 210.84,11.72
N$2
  Bottom 0.813: 134.77,20.56 T36.1 | R86.2 134.77,16.61
  Bottom 1.27: 134.77,16.61 134.77,20.56
N$3
  Bottom 1.27: 24.44,124.45 U$54.1 24.44,124.45 | 24.44,124.45 24.28,124.45 24.44,124.45 | U$76.1 19.68,144.14 19.68,141.6 21.11,139.85 21.11,126.04 23.01,124.45 24.44,124.45
N$4
  Bottom 1.016: 24.6,142.39 U$77.1
  Bottom 1.27: U$38.1 | U$38.1 24.6,129.69 | 24.6,142.39 24.6,140.96 27.46,138.11 27.46,132.39 U$38.1 | U$38.1
N$5  (via drill 0.61)
  other vias: 192.56,45.71 191.13,46.98 193.99,43.97 195.42,42.86 197,41.27 201.13,33.17 201.93,36.35 202.08,34.6 198.91,53.97 200.02,52.86 201.29,51.75 202.4,50.79 203.35,49.68 204.47,48.89 197.48,55.24 189.86,62.54 190.97,61.43 192.08,60.32 193.19,59.21 194.3,58.1 195.57,56.99 241.36,82.54 242.86,84.04 241.36,85.04 239.86,85.04 239.86,81.54 237.86,81.54 237.86,85.04
  pour Top (isolate 0.762, no thermals): 117.15,31.43 115.57,33.01 113.98,34.6 113.98,43.81 127.47,57.62 149.54,57.94 154.14,63.18 176.53,63.18 179.86,63.18 181.91,63.18 185.27,66.53 185.27,84.53 186.27,85.53 242.77,85.53 243.77,84.53 243.77,83.53 240.77,80.53 191.27,80.53 189.95,79.35 189.95,63.18 205.89,48.89 205.89,47.46 205.73,33.49 203.67,31.43 188.59,31.58 177.8,42.38 151.28,42.22 140.33,31.43
  pour Bottom (isolate 0.014, no thermals): 114.3,44.13 127.31,57.62 155.41,58.26 163.98,49.68 170.18,49.52 173.35,52.22 186.53,52.06 190.97,48.25 202.56,36.35 202.72,33.65 200.81,31.74 187.48,31.74 176.68,42.54 151.12,42.38 140.33,31.59 116.99,31.59 115.88,32.7 114.3,34.28
  pour Bottom (isolate 1.5, no thermals): 232.43,93.59 229.77,90.93 188.77,91.03 186.27,88.53 186.43,65.2 197.8,53.97 204.62,47.62 207.48,50.32 207.77,54.03 190.27,70.03 190.27,76.74 193.64,80.61 241.27,80.53 243.77,82.53 243.77,95.53 245.27,97.03 247.77,97.03 248.58,97.85 248.58,98.65 248.58,107.88 247.25,109.69 234.51,109.69 232.28,106.19
N$6
  Bottom 0.61: TR1.3 149.54,85.72 | TR1.3 | TR1.3 TR2.3 | TR1.3 | TR1.3 149.58,87.19 150.01,87.62 163.71,87.66 163.83,87.78
  Bottom 1.016: D6.A D7.A 163.83,87.78 R2.1
N$7
  Bottom 0.406: R18.2 48.89,137.15 50.48,135.72 50.32,114.45 44.6,108.74 36.83,108.74 33.49,105.4 33.33,105.24 28.73,100.64 28.73,91.91 26.51,89.69 J1.19
N$8
  Top 0.813: T9.3 180.34,95.88 170.81,105.4 121.28,105.4 111.12,115.56 111.12,135.88 107.95,139.06 107.95,154.3 110.03,156.38 D25.2
  Bottom 0.813: D6.K 173.99,94.77 | D6.K R14.2 | D6.K 176.53,93.97 177.95,93.02 177.95,92.7 T9.5 | T9.5 178.59,92.07 | T9.3 180.02,91.59 179.38,92.23 T9.5 | R79.1 163.35,156.11 164.92,156.24 180.79,156.24 182.19,156.11 R81.1 | R79.1 163.27,156.03 | R77.1 R79.1 | R77.1 143.27,156.03 | R75.1 R77.1 | R75.1 123.27,156.03 | 113.27,156.53 D25.2 114.54,156.11 R75.1
N$9
  Bottom 0.61: R30.2 77.78,41.9 77.78,39.05 75.88,37.14 43.49,37.14 36.19,44.44 R33.2 32.7,44.44 R53.1
N$10
  Bottom 0.813: F2.1B F2.1A 15.87,145.09 17.78,147.15 29.84,147.15 29.84,147 | U$8.1 29.68,144.3 29.84,144.46 29.84,147 | U$78.1 44.92,145.73 43.49,147.15 30,147.15 29.84,147
N$11
  Bottom 0.61: R7.1 31.75,120.01 33.65,118.1 41.27,118.1 | 41.27,118.1 41.43,118.1 41.11,117.79 T4.2 | D18.A 46.19,120.96 43.33,118.1 41.27,118.1
N$12
  Bottom 0.813: U4.12 59.84,90.8 C7.1 65.56,92.39 67.78,94.61 67.78,100.64 R19.2
N$13
  Bottom 0.61: R21.1 63.97,101.75
  Bottom 0.813: U4.13 57.3,92.54 | 57.3,92.54 56.67,91.75 56.99,91.75 C7.2 | C7.2 56.03,92.39 | 57.3,92.54 C7.2 | 57.3,92.54 60.96,95.56 C8.2 62.07,96.2 R21.1 | R20.1 60.96,103.66 63.97,101.75 R24.1
N$14
  Bottom 0.61: T6.4 17.3,51.75 17.93,52.38 T6.1 18.25,52.38 22.38,48.09 22.22,48.09 24.13,46.35 36.98,46.35 43.81,38.89 72.86,38.89 74.93,40.95 74.93,43.81 | 74.93,43.97 U3.8 | 74.93,43.97 C21.2 | 74.93,43.97 | 74.93,43.81 74.93,43.97 | 74.93,43.81
N$15
  Bottom 0.813: R2.2 173.99,89.69 177.48,89.69 T9.2 | R2.2 D7.K | R13.2 R2.2
N$16
  Bottom 0.61: R17.2 | R17.2 | R51.2 R17.2 | R17.2 | R17.2 26.35,109.85 28.41,111.59 41.91,111.59 43.49,113.82 T4.1
N$17
  Bottom 0.813: R4.1 32.38,32.06 32.54,32.22 31.75,33.01 C23.1
N$18
  Bottom 0.61: T5.1 25.71,52.22 30.63,52.38 31.27,51.75 D21.A | D21.A | D21.A 35.87,51.59 39.37,48.09 44.6,48.09 R34.2 53.49,48.09 | 53.49,48.09 R48.1 | 53.49,48.09 | 50.64,47.78 R32.1 | 50.64,47.78 50.32,48.09 | 50.64,47.78 50.64,48.09 53.49,48.09 | 53.49,48.09
  Bottom 0.813: T5.4 24.44,51.43 T5.1
N$19
  Bottom 0.61: TR2.8 134.58,73.85 134.46,73.97 134.58,74.09
  Bottom 0.813: C14.1 99.06,78.89 103.5,78.89 111.44,78.89 114.61,82.07 T7.2 133.35,82.07 134.62,82.07 | 134.58,74.09 134.58,82.03 134.62,82.07 | TR1.1 134.34,85.76 134.3,85.72 134.62,85.4 134.62,82.07
N$20
  Bottom 0.813: R79.2 163.27,146.03 | T23.1 163.27,142.03
  Bottom 1.27: 163.27,142.03 R79.2
N$21
  Bottom 0.813: R5.2 10.47,35.24 8.56,33.33 C22.2
N$22
  Bottom 0.813: TRA1.P2 105.25,65.87 103.66,65.72 102.23,67.14 88.42,67.14 | 88.42,67.14 | 88.42,67.14 C1.1 88.42,66.67 | D11.A 89.69,53.97 87.31,56.35 87.31,65.56 88.42,66.67 | 88.42,66.67
N$23
  Bottom 0.406: R8.2
  Bottom 0.61: T2.1 46.83,133.18 48.41,131.6 48.41,125.41 48.26,125.09 | R8.2 48.26,125.09 | R8.2 | 31.75,108.42 33.49,110.01 43.49,110.01 48.41,115.09 48.41,124.14 48.26,125.09
  Bottom 0.813: R52.2 31.75,108.42
N$25
  Bottom 0.813: D13.A 73.34,117.94 76.51,121.12 R6.1 | R6.1 | 81.91,122.23 C17.N 81.91,122.23 | R6.1 81.59,121.75 81.91,122.23
N$26
  Bottom 0.61: R23.2 48.89,64.29 49.37,63.81 53.34,63.81 54.29,64.76 C15.1
N$27
  Bottom 0.61: 80.8,60.16 R15.2 | R15.2 80.8,60.16 | 80.8,60.16
  Bottom 0.813: R15.2 80.96,63.18 | 80.96,63.18 D10.K | R15.2 | 80.96,63.18 C1.2 | 80.96,63.18 | R15.2 80.8,60.32 80.96,60.48 80.96,63.18
N$28
  Bottom 0.61: R40.2 44.6,51.43 44.45,51.59 D21.K
N$29
  Bottom 0.813: R6.2 72.86,121.12 76.04,124.29 79.37,124.29 D27.K | D27.K
N$30
  Bottom 0.813: R81.2 183.27,146.03 | T3.1 183.27,142.03
  Bottom 1.27: 183.27,142.03 R81.2
N$31
  Bottom 0.406: 52.07,74.29 | 52.07,74.29 R22.1 52.07,79.37 53.34,80.64 56.51,80.64 57.46,79.69 57.46,78.42 57.15,78.1 U4.2 | C15.2 54.29,72.07 52.07,74.29
  Bottom 0.813: R40.1 44.6,65.72 47.46,68.57 53.49,68.57 54.29,69.37 C15.2
N$32
  Bottom 0.813: R24.2 51.27,101.91 50,100.96 P3.3
N$33
  Top 0.61: R41.1 44.29,73.65 51.43,80.64 66.04,80.64 67.46,79.21 U4.6
  Bottom 0.61: U4.7 70,77.78
  Bottom 0.813: U4.6 U4.7
N$35
  Top 0.813: U4.1 51.11,78.1 R23.1
  Bottom 0.813: 47.78,70.95 R23.1 | R26.1 | 47.78,70.95 47.3,70.95 R26.1 | C16.2 51.11,70.95 47.78,70.95 | C16.2
N$36
  Bottom 0.406: R25.2 46.03,81.75 46.99,81.91 58.42,81.91 59.84,80.48 U4.3 59.84,75.56 59.84,74.29 | 60.32,74.29 | 60.32,74.29 60.96,73.65 C39.1 | 59.84,74.29 60.32,74.29 | 59.84,74.29 60.32,74.29 | 60.32,74.29 | 59.84,74.29 D36.A
N$37  (via drill 0.61, 1.42 pad 6.45)
  other vias: 240.03,113.98 240.03,115.72 241.3,119.21 243.52,119.21 245.42,119.21 247.33,119.21 249.23,119.21 224.15,112.39 196.05,112.07 224.15,112.39 224.15,112.39
  pour Bottom (isolate 0.356, no thermals): 119.22,131.6 253.3,131.6 255.37,129.06 255.27,90.53 253.53,89.03 250.27,89.03 249.27,90.03 249.27,92.53 252.77,96.03 252.53,110.27 248.69,113.02 230.83,113.34 228.27,107.53 228.27,100.03 223.77,95.53 188.77,95.53 170.8,113.5 122.87,113.66 117.31,119.21 116.2,120.33 116.2,128.74 118.74,131.6
  pour Top (isolate 1.5, no thermals): 247.96,131.12 255.42,123.82 255.58,90.64 253.52,88.89 194.94,88.89 170.18,113.66 122.87,113.5 116.2,120.17 116.2,128.58 119.06,131.44 120.03,131.44 215.42,131.12
N$38  (via drill 1.02)
  other vias: 22.38,74.29
N$39
  Bottom 0.61: 149.58,70.68 149.54,70.64 | 149.58,70.68 TR1.5 149.82,72.19 150.17,72.54 163.15,72.66 163.51,73.02 R3.1 | TR2.5 149.58,70.68 | R3.1
  Bottom 0.813: 163.51,74.29 163.51,73.97 163.51,73.02 163.51,72.07 R3.1 163.67,75.4 163.98,75.56 D9.A 163.67,79.21 163.98,79.21 163.83,79.05 D8.A
N$40
  Bottom 0.813: 178.27,79.05 | 178.27,79.05 D8.K 171.45,79.05 169.86,77.62 169.86,74.61 165.1,70.32 164.14,69.84 R11.2 | 178.27,79.05 | T10.5 178.11,79.37 | 178.11,79.37 | 178.11,79.37 177.95,79.21 T10.5 | 180.02,79.05 T10.3 | T10.5 178.43,79.21 179.38,79.21 | 178.27,79.05 T10.5 | T10.5 | 174.77,6.45 R90.1 R88.1 | 174.77,6.45 R92.1 D28.2 202.88,6.98 207.32,7.3 208.59,8.57 208.59,8.53 | 174.77,6.45 174.77,6.53 | R88.1 154.27,6.53 | 133.77,6.45 R86.1 | R88.1 133.77,6.45 | 133.77,6.45 133.77,6.53 | 208.59,8.53 208.77,8.53 | 208.43,38.41 208.43,8.53 208.59,8.53
  Bottom 1.016: 192.4,55.08 208.43,38.41 | 178.27,79.05 178.43,79.21 178.43,78.89 178.75,79.05 180.02,79.05 181.61,78.57 182.72,77.46 182.72,64.76 184.94,62.54 188.11,59.37 192.4,55.08 | 192.4,55.08
N$41
  Bottom 0.813: R12.2 166.21,66.83 167.48,68.1 171.6,72.22 173.67,72.22 R3.2 173.83,75.4 173.67,75.56 | 173.67,75.56 | 173.67,75.56 D9.K 174.78,76.03 175.41,76.51 178.11,76.51 T10.2 | T10.2
N$42
  Bottom 0.813: 154.27,20.37 T37.1
  Bottom 1.27: R88.2 154.27,20.37
N$43
  Bottom 0.813: P2.1 45.56,90.48 R21.2
N$44
  Bottom 0.406: T1.4 55.08,62.06 D36.K
  Bottom 0.61: T1.4 49.53,62.06 48.89,61.43 T1.1
N$45
  Bottom 0.406: 30.16,57.46 C28.P
  Bottom 0.61: T5.2 32.54,53.81 | 32.54,53.81 33.97,54.6 R37.2 | R38.2 27.46,58.89 28.89,57.46 30.16,57.46 | 30.16,57.46 C28.P | 30.16,53.81 30.16,57.46 | 32.54,53.81 30.16,53.81 | 30.16,53.81
N$46
  Bottom 0.61: R48.2 | T1.2 52.38,59.52 R48.2
N$47
  Bottom 0.61: T6.2 18.89,53.65 22.86,49.52 30.32,49.52 32.06,48.09 34.29,48.09 34.44,48.25 | 34.44,48.25 | 34.44,48.25 R34.1
N$48
  Bottom 0.813: U3.10 72.39,62.54 72.86,63.02 72.86,67.3 74.45,69.05 75.4,69.05 75.56,69.05 C31.1 76.04,69.05 | R30.1 77.94,68.1 76.99,69.05 76.04,69.05 | 76.04,69.05
N$49
  Bottom 0.61: 22.38,71.75 22.38,74.29
N$50
  Bottom 0.813: 73.81,57.62 74.93,58.73 U3.9 74.93,64.92 75.56,65.56 C32.2 | 73.81,57.62 | 73.81,57.62 72.07,55.87 57.78,55.87 57.15,55.24 57.15,54.92 57.15,52.86 | 57.15,52.86 | U3.1 57.15,52.86
N$51
  Bottom 0.813: 67.31,49.05 67.31,43.65 66.51,42.86 64.77,42.86 C26.1 | 67.31,49.05 U3.5 | 67.31,49.05 R36.1
N$52
  Bottom 0.813: U3.6 69.85,47.14 71.12,45.87 72.23,45.87 R31.2 | R31.2
N$53
  Bottom 0.813: 72.39,52.54 | 72.39,52.54 U3.7 | R36.2 72.39,49.36 72.39,52.54
N$54  (via drill 1.02)
  other vias: 24.92,81.91
N$55
  Bottom 0.813: D3.A 74.45,114.45 77.94,117.94 79.37,117.94 79.53,117.79 D13.K | D13.K | D13.K 79.69,117.79 82.23,115.25 C3.N 84.45,115.25
N$56
  Bottom 0.813: U4.9 67.46,90.48 70.16,93.18 70.16,99.53 C36.1 | C36.1 73.34,102.7 | C36.1 76.2,102.55 | R46.1 76.35,105.09 76.2,104.93 76.2,102.55 | 76.2,102.55 78.1,102.39 79.85,100.01 | 79.85,95.24 | 79.85,95.24 R45.2 | 79.85,100.01 79.85,95.24 | 79.85,100.01 79.85,98.26 82.7,98.1 83.18,97.62 C35.1 83.66,97.47 R44.2 | R44.2
N$57
  Bottom 0.813: U4.10 64.92,88.26 64.13,89.05 R47.2
N$59  (via drill 1.02)
  other vias: 24.92,89.53
N$60  (via drill 1.02)
  other vias: 22.38,81.91
N$61  (via drill 1.02)
  other vias: 22.38,71.75
N$62  (via drill 1.02)
  other vias: 24.92,74.29
N$63
  Bottom 0.813: 174.27,20.29 T25.1
  Bottom 1.27: R90.2 174.27,20.29
N$65  (via drill 1.02)
  other vias: 24.92,79.37
N$66  (via drill 1.02)
  other vias: 22.38,84.45
N$68
  Bottom 0.813: 194.27,20.53 194.27,20.29 T38.1
  Bottom 1.27: R92.2 194.27,20.29
N$69  (via drill 1.02)
  other vias: 24.92,76.83
N$74
  Bottom 0.61: R9.2 R55.2
  Bottom 1.27: C11.2 C12.2 157.48,61.43 D2.A
  Bottom 1.422: D2.A 165.73,53.49 168.59,53.49 R9.2
N$75
  Bottom 1.016: R54.2 159.38,100.96 161.6,101.28 161.92,101.28 162.56,101.91 R10.2
  Bottom 1.27: D1.A 150.81,109.53 150.97,109.37 C10.2 C5.2 159.06,107.94 158.9,105.09 162.71,101.91 R10.2
N$83
  Bottom 0.813: R75.2 123.27,146.03 | T11.1 123.27,142.03
  Bottom 1.27: 123.27,142.03 R75.2
N$86
  Bottom 0.813: R77.2 143.27,146.03 | T12.1 143.27,142.03
  Bottom 1.27: 143.27,142.03 R77.2
PWM
  Bottom 0.61: U3.11 69.85,62.22 68.42,63.65 68.42,71.11 69.37,72.38 74.29,72.38 75.56,72.38
  Bottom 0.813: 90.96,72.22 R1.2 | 90.96,72.22 90.8,72.38 77.31,72.38 | 77.31,72.38 75.72,72.38 | 75.56,72.38 77.31,72.38 | 77.31,72.38 | T7.1 | T7.1 124.46,79.21 124.46,79.37 | 124.46,79.37 T7.1 | 90.96,72.22 117.31,72.22 124.46,79.37
RD
  Top 0.813: C22.1 3.3,26.95 6.35,30 6.35,35.55 5.08,36.82 3.33,36.82 | 3.33,36.82 | 3.33,36.82 C24.1
  Bottom 0.813: 14.92,21.58 18.57,21.58 19.2,20.95 19.2,18.41 19.16,18.36 D4.K 19.28,18.02 19.36,17.93 U$74.1 | D5.K 15.24,21.9 14.92,21.58 | C22.1 5.07,18.09 8.57,21.58 14.92,21.58
REG
  Bottom 0.61: R27.2 40.16,54.76 40.32,54.92 40.48,54.76 R26.2 43.81,54.76 44.45,54.76 45.72,53.49 D20.K 47.3,51.11 48.1,50.32 58.73,50.32 59.69,51.27 U3.2
RESEAU  (via drill 1.02)
  Top 0.813: 9.84,89.21 9.68,89.37 9.68,89.05 | 9.84,89.21 | v22.38,86.99 19.52,86.99 19.05,86.99 12.06,86.99 9.84,89.21 | 9.68,89.05 9.2,97.47 9.36,143.98 14.92,150.17 17.3,150.49 92.23,150.49 92.39,150.49 94.61,148.27 94.61,139.06 D24.K | R70.2 9.68,89.05
  Bottom 0.61: D23.K 97.47,118.26 95.25,120.96 C38.P
  Bottom 0.813: D24.K 93.34,135.57 95.56,133.34 95.72,124.45 95.25,123.98 C38.P
RL
  Bottom 0.813: R5.1 15.08,14.76 | 15.08,14.76 15.08,9.2 16.82,7.45 24.44,7.45 27.78,10.79 U$71.1 30.79,13.65 32.22,13.8 32.38,13.65 R4.2 | D5.A 15.08,17.93 15.08,14.76
SI
  Bottom 0.406: 54.61,84.29 56.51,83.02 63.81,83.02 64.92,81.59 | U4.5 64.77,77.94 | U4.5 | U4.5
  Bottom 0.813: C8.1 55.08,95.56 50,89.21 P2.3 | 49.84,85.4 P2.2 39.84,85.56 39.37,85.56 | 49.84,85.4 50,85.56 | 49.84,85.4 49.84,87.78 P2.3 | P2.3 50.16,87.94 50,85.56 | 50,85.56 R22.2 54.29,84.61 54.61,85.4 | 54.61,85.4 U4.14 | 54.61,85.4 54.61,84.29 | 64.92,81.59 64.92,80.16 | 64.92,80.16 U4.5 64.92,80.16 | C9.1 73.66,80.32 72.39,81.59 65.08,81.59 64.92,80.16
TRANSF3  (via drill 0.61)
  Bottom 0.61: 144.46,87.62 144.62,87.62 | 113.03,109.53 D1.K | 112.71,137.79 112.71,110.01 113.03,109.69 113.03,109.53 | 113.03,109.53 113.03,102.86 113.18,102.7 113.18,102.07 | 144.58,88.85 144.62,88.89 TR2.4
  Bottom 0.813: T9.1 180.49,87.78 179.86,87.15 T9.4 | TR2.4 144.58,87.82 144.62,87.78 144.46,87.62 | TR1.4 144.58,88.85 144.62,88.89 144.62,89.05 | 144.62,89.53 144.62,96.51 143.35,97.15
  Bottom 1.016: 144.62,87.78 144.62,88.89 144.62,89.53 144.78,92.7 157.32,92.86 161.76,97.15 R14.1 167,97.15 | R13.1 165.1,84.45 167,86.35 167,97.15 | T9.4 180.97,87.15 182.72,88.89 182.72,97.31 180.65,99.37 167.79,99.37 167,98.58 167,97.15 | R54.1 135.73,101.91 132.39,101.91 117.63,102.07 113.18,102.07 R10.1 | 143.35,97.15 139.85,97.15 136.84,99.37 126.68,99.37 125.57,98.42 111.91,98.42 109.85,100.8 109.85,103.66 110.8,104.61 110.8,135.72 112.39,137.63
  Bottom 1.27: 250.01,36.97 D31.K | D1.K 127.63,109.53 | 112.71,137.79 112.07,138.58
  other vias: 248.6,43.97 250.19,43.97 252.09,43.97 255.74,43.97 257.33,43.97 258.92,43.97 258.92,40.63 258.92,39.36 258.92,37.94 258.92,36.51 206.21,156.05 208.43,156.05 210.34,156.05 212.08,156.05 177,159.06 181.76,159.06 180.18,159.06 178.59,159.06 144.46,159.06 142.76,159.06 147.6,159.04 131.62,154.38 118.34,159.22 122.23,154.14 122.23,159.22 119.85,159.22 115.88,159.22 110.8,159.86 112.71,159.86 109.69,153.35 109.69,151.44 111.28,153.35 117.47,154.62 120.17,154.46 128.58,154.46 129.85,154.46 126.52,154.46 131.44,151.76 133.34,151.76 135.09,151.76 136.84,151.76 138.71,151.76 149.62,151.76 146.68,151.76 152.08,151.6 154.14,151.6 155.89,151.6 157.95,151.6 176.37,151.12 178.27,150.97 187.64,151.12 189.22,151.12 190.81,151.12 195.73,150.81 197.64,150.81 199.54,150.81 201.45,150.81 207.16,150.81 209.07,150.81 210.97,150.81 187.32,156.05 188.91,156.05 190.65,156.05 195.73,156.05 197.32,156.05 199.07,156.05 200.97,156.05 164.78,159.86 162.87,159.86 166.52,159.86 168.43,159.86 170.33,159.86 172.24,159.86 146,159.04 124.68,159.38 115.72,154.78 149.19,159.04 150.77,159.04 152.2,159.04 153.63,159.04
  pour Bottom (isolate 0.762, no thermals): 109.22,161.44 223.2,160.81 224.94,159.7 221.61,139.69 219.07,137.15 110.49,137.15 107.95,140.65 107.95,160.81
  pour Bottom (isolate 0.762, no thermals): 250.82,160.49 256.69,154.62 265.43,145.25 265.11,37.94 262.89,35.71 248.6,35.55 247.33,36.82 247.33,47.14 248.6,48.73 255.9,48.73 259.08,50.95 259.39,134.3 257.33,136.84 219.39,136.99 215.9,140.01 211.45,160.49
  pour Top (isolate 1.5, no thermals): 221.77,154.78 255.11,154.78 265.11,144.77 264.95,38.73 262.41,36.35 248.92,36.03 247.8,37.14 247.8,47.94 248.6,48.73 256.54,48.73 259.08,50.64 259.39,134.93 256.54,137.79 224.94,137.79 223.99,138.74 223.99,149.69 221.29,152.39 221.29,154.3
  pour Top (isolate 0.8, no thermals): 109.06,153.03 109.06,160.01 110.49,161.44 248.92,161.44 265.27,145.09 265.27,144.3 257.17,136.2 113.82,136.2 109.06,140.96 109.06,151.76 109.06,152.71
TRANSF4
  pour Bottom (isolate 0.014, no thermals): 120.8,57.94 120.8,54.29 114.14,47.62 111.28,44.76 111.12,36.51 111.28,26.66 111.28,12.85 111.28,10 110.49,9.2 87.63,9.2 86.04,10.79 86.2,21.11 88.1,23.01 88.42,31.58 88.74,31.58 101.75,44.44 101.75,50.79 110.49,58.89 113.66,59.05 119.38,59.05
  pour Top (isolate 0.014, no thermals): 101.91,50.95 107.79,56.35 110.49,59.05 119.22,59.05 120.49,57.62 120.49,53.97 111.28,44.44 111.28,37.3 111.28,26.66 111.28,9.68 109.22,7.77 87.94,7.77 85.88,9.84 85.88,20.79 88.26,23.17 88.26,31.11 100.48,43.02 101.91,44.29
~1
  Bottom 0.813: U$88.1 89.21,142.55 89.53,133.18 88.58,132.23 B1.3 91.75,132.23 93.34,130.64 D24.A | D24.A
~2
  Bottom 0.813: 85.88,127.15 B1.2 85.24,126.99 85.88,126.83 85.88,127.15 | 86.67,116.2 86.67,123.82 85.88,124.61 85.88,127.15 | D23.A 86.67,117.63 86.67,116.2 | C3.P 85.4,112.71 86.67,113.98 86.67,116.2 | 85.88,127.15 85.88,137.63 80.64,142.87 U$106.1 | U$106.1

## Text on the board
tNames: 65V | + | +SH | -U | EV | B | G | -SH | DEF | 0 | 15V | 0 | 15V | + | W04 | mini | Maxi | 1 | RD | RL | +